# EAGLE board board 1 (EAGLE 5.06)
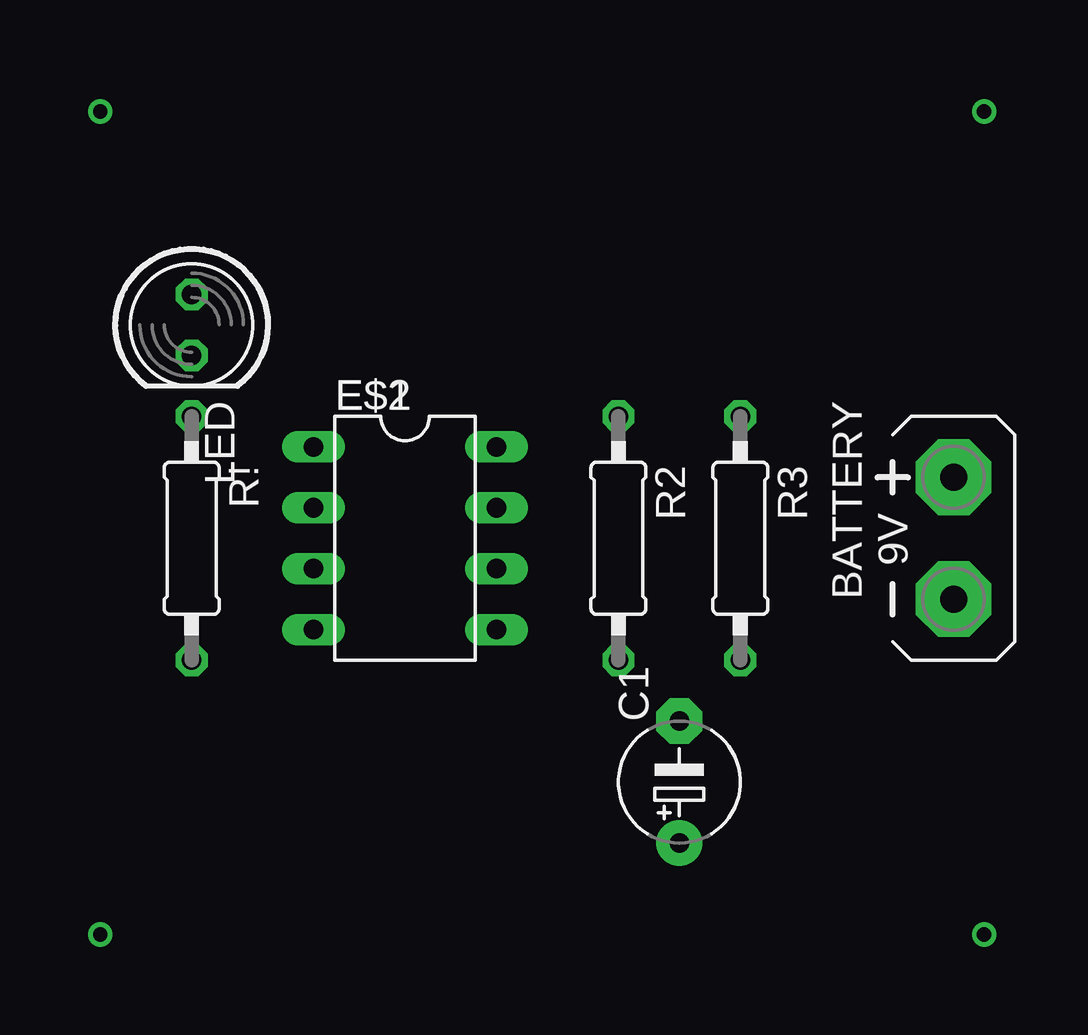
[diagram p0: board, top side]
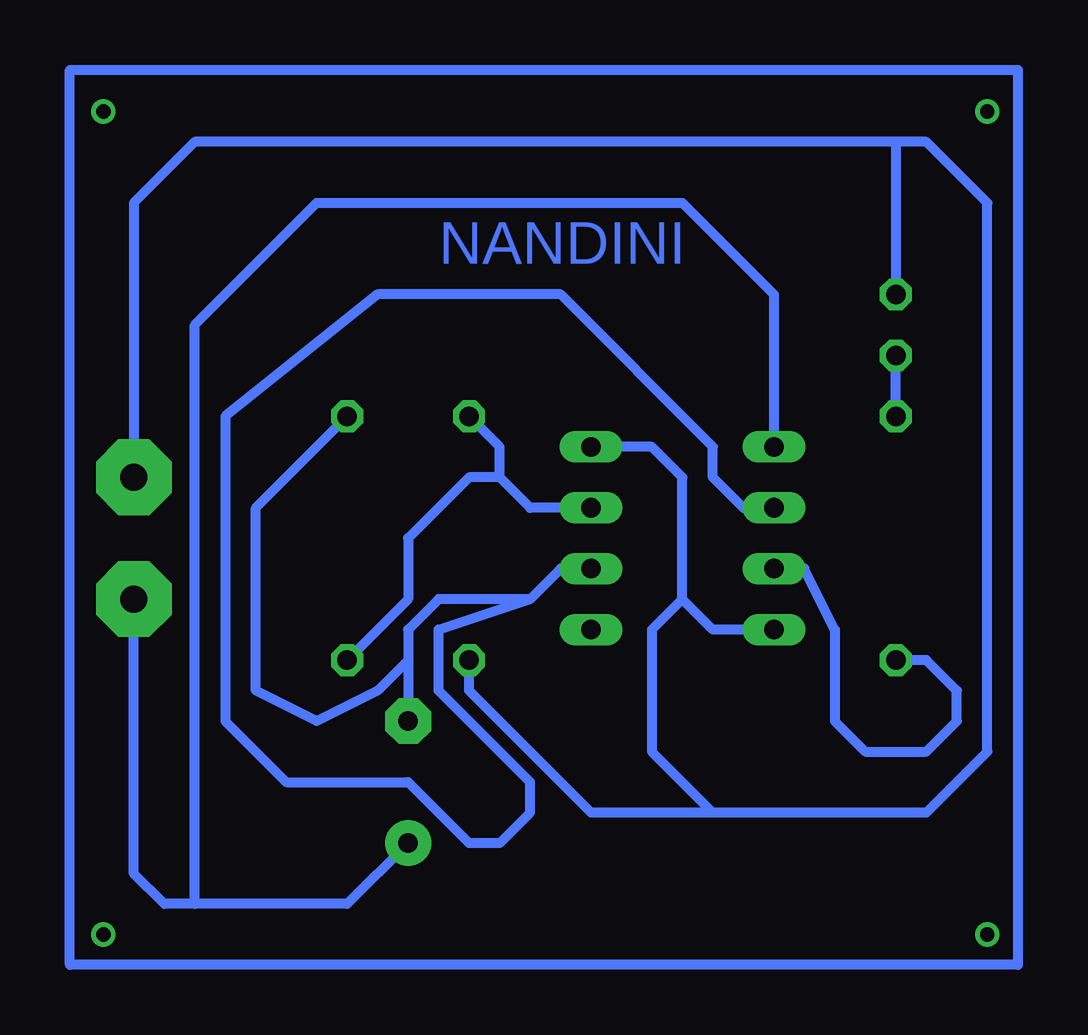
[diagram p1: board, bottom side, seen from below]

No outline drawn. Coordinates in mm, seen from the top.
Copper layers (1*16): Top 0.035mm / dielectric 1.5mm / Bottom 0.035mm
Design rules "default": minimum track width 10mil, minimum drill 24mil, track to track 8mil, track to pad 8mil, pad to pad 8mil, via to via 8mil, smd to smd 8mil, copper to edge 40mil, drill to drill 8mil, minimum pad ring 10mil, minimum via ring 8mil, stop-mask expansion 4mil, vias tented up to drill 0mil, thermal gap 10mil

## Footprints (pad centres in the part's own frame; a part is rotated, then mirrored left to right if it is on the bottom)
AB9V = drill 1.118 pad 3.15 octagon: + 0,2.54; - 0,-2.54
E5-5 = drill 0.813 pad 1.905 round: + -2.54,0 | drill 0.813 pad 1.905 octagon: - 2.54,0
DIL08 = drill 0.813 long: 1 -3.81,-3.81; 2 -1.27,-3.81; 3 1.27,-3.81; 4 3.81,-3.81; 5 3.81,3.81; 6 1.27,3.81; 7 -1.27,3.81; 8 -3.81,3.81
LED5MM = drill 0.813 octagon: A -1.27,0; K 1.27,0
0207/10 = drill 0.813 octagon: 1 -5.08,0; 2 5.08,0

## Placement (x,y rotation side)
BATTERY  [AB9V]  72.39,26.67 0 top
C1  UF  [E5-5]  60.96,16.51 90 top
E$1  [DIL08]  49.53,26.67 270 top
E$2  680K  [DIL08]  49.53,26.67 270 top
LED  [LED5MM]  40.64,35.56 270 top
R2  680K  [0207/10]  58.42,26.67 270 top
R3  10K  [0207/10]  63.5,26.67 270 top
R!  1K  [0207/10]  40.64,26.67 270 top

## Library data of the parts
BATTERY = battery
C1 R2 R3 R! = resistor
E$1 E$2 = ic-package
LED = led

## Nets
S$2: BATTERY.+ E$1.4 E$1.8 LED.A R2.2
S$5: E$1.7 R2.1 R3.2
S$6: C1.- E$1.2 E$1.6 R3.1
S$7: E$1.3 R!.2
S$8: LED.K R!.1
S$9: BATTERY.- C1.+ E$1.1

## Tracks (layer width: path | path; a pad name or v marks a point on that pad's centre or on a via)
S$1
  Bottom 0.406: 35.56,8.89 75.06,8.89 75.06,46.19 35.56,46.19 35.56,8.89
S$2
  Bottom 0.406: 49.53,24.13 49.53,29.21 50.8,30.48 E$1.8 | 49.53,24.13 48.26,22.86 E$1.4 | 49.53,24.13 50.8,22.86 50.8,17.78 48.26,15.24 | R2.2 58.42,20.32 53.34,15.24 48.26,15.24 | 48.26,15.24 39.37,15.24 36.83,17.78 36.83,40.64 39.37,43.18 | 39.37,43.18 40.64,43.18 LED.A | BATTERY.+ 72.39,40.64 69.85,43.18 39.37,43.18
S$3  (via drill 0.6)
  other vias: 36.83,44.45
S$4  (via drill 0.6)
  other vias: 73.66,44.45
S$5
  Bottom 0.406: E$1.7 55.88,27.94 57.15,29.21 | 57.15,29.21 57.15,30.48 R2.1 | 57.15,29.21 58.42,29.21 60.96,26.67 60.96,24.13 R3.2
S$6
  Bottom 0.406: R3.1 67.31,27.94 67.31,20.32 64.77,19.05 62.23,20.32 60.96,21.59 | 60.96,21.59 C1.- | 60.96,21.59 60.96,22.86 59.69,24.13 55.88,24.13 | E$1.6 54.61,25.4 55.88,24.13 | 55.88,24.13 59.69,22.86 59.69,20.32 55.88,16.51 55.88,15.24 57.15,13.97 58.42,13.97 60.96,16.51 66.04,16.51 68.58,19.05 68.58,31.75 62.23,36.83 54.61,36.83 48.26,30.48 48.26,29.21 46.99,27.94 E$1.2
S$7
  Bottom 0.406: E$1.3 44.45,25.4 43.18,22.86 43.18,19.05 41.91,17.78 39.37,17.78 38.1,19.05 38.1,20.32 39.37,21.59 R!.2
S$8
  Bottom 0.406: R!.1 LED.K
S$9
  Bottom 0.406: E$1.1 45.72,36.83 49.53,40.64 64.77,40.64 69.85,35.56 69.85,11.43 | BATTERY.- 72.39,12.7 71.12,11.43 69.85,11.43 | 69.85,11.43 63.5,11.43 C1.+
S$10  (via drill 0.6)
  other vias: 73.66,10.16
S$11  (via drill 0.6)
  other vias: 36.83,10.16

## Text on the board
Bottom: NANDINI